# EAGLE board promini7via (EAGLE 9.6.2)
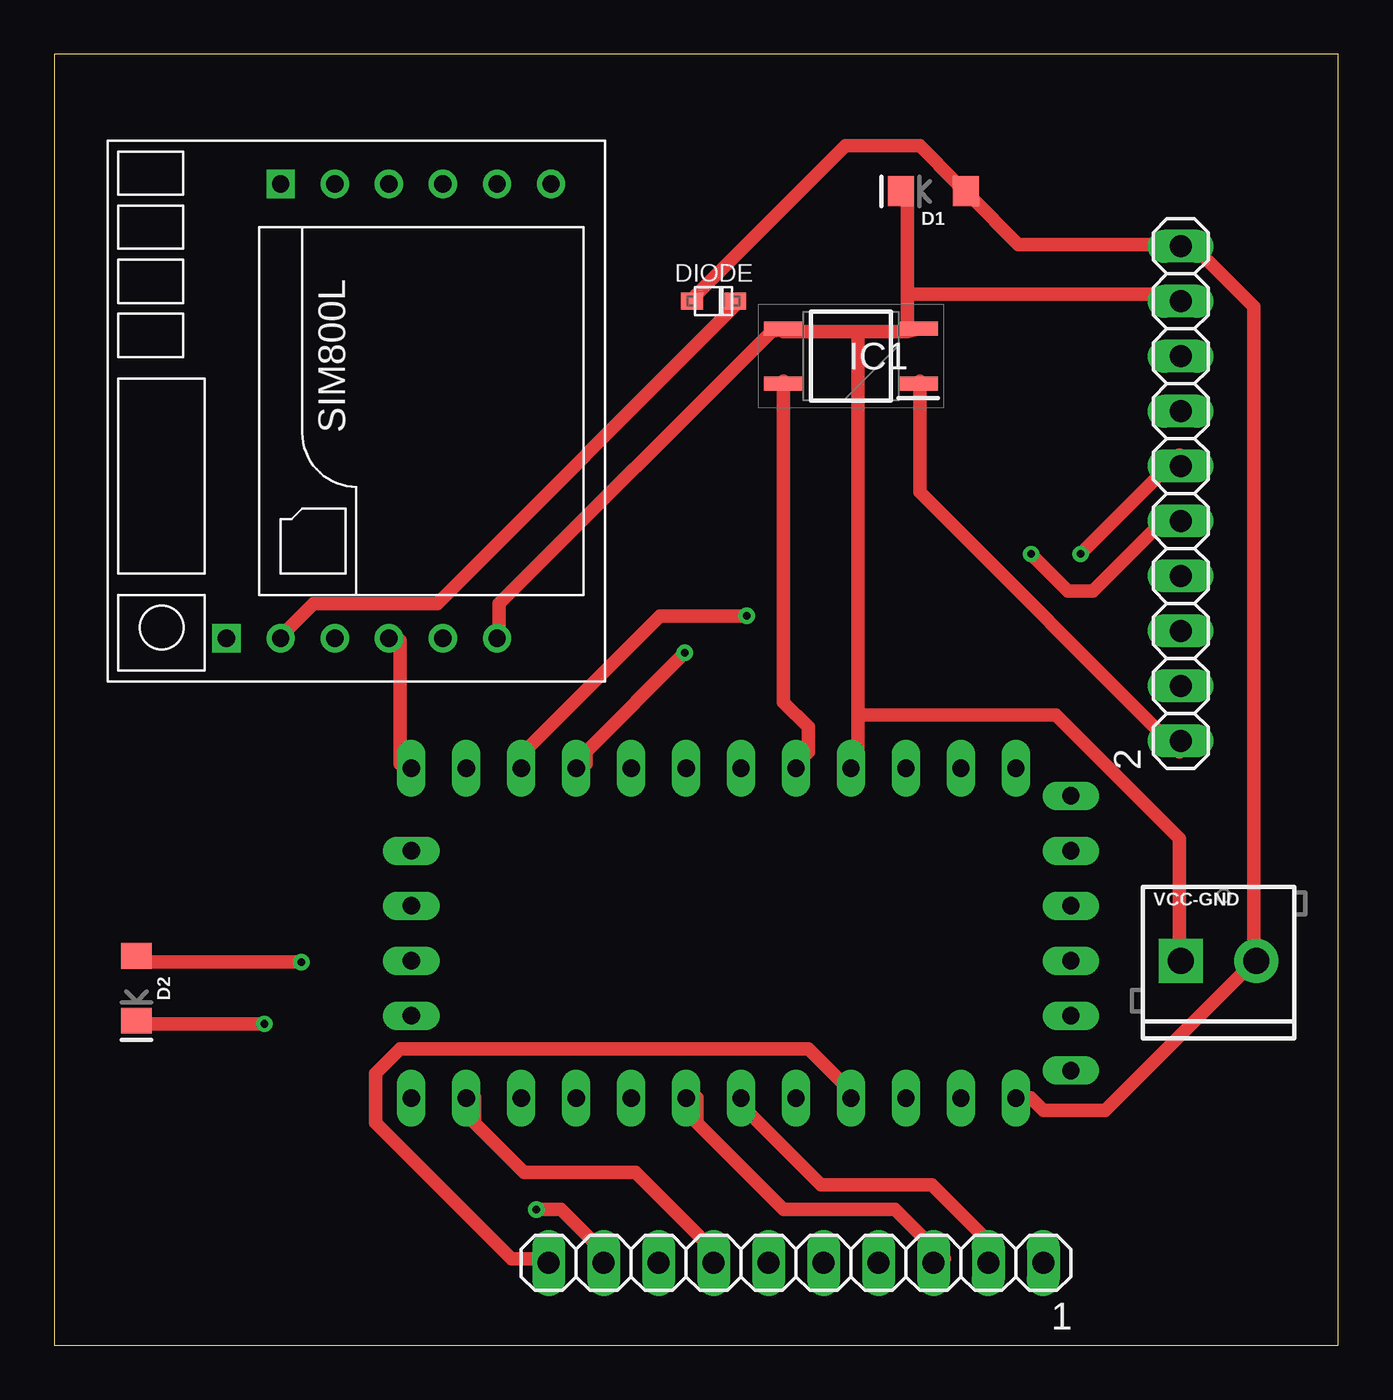
[diagram p0: board, top side]
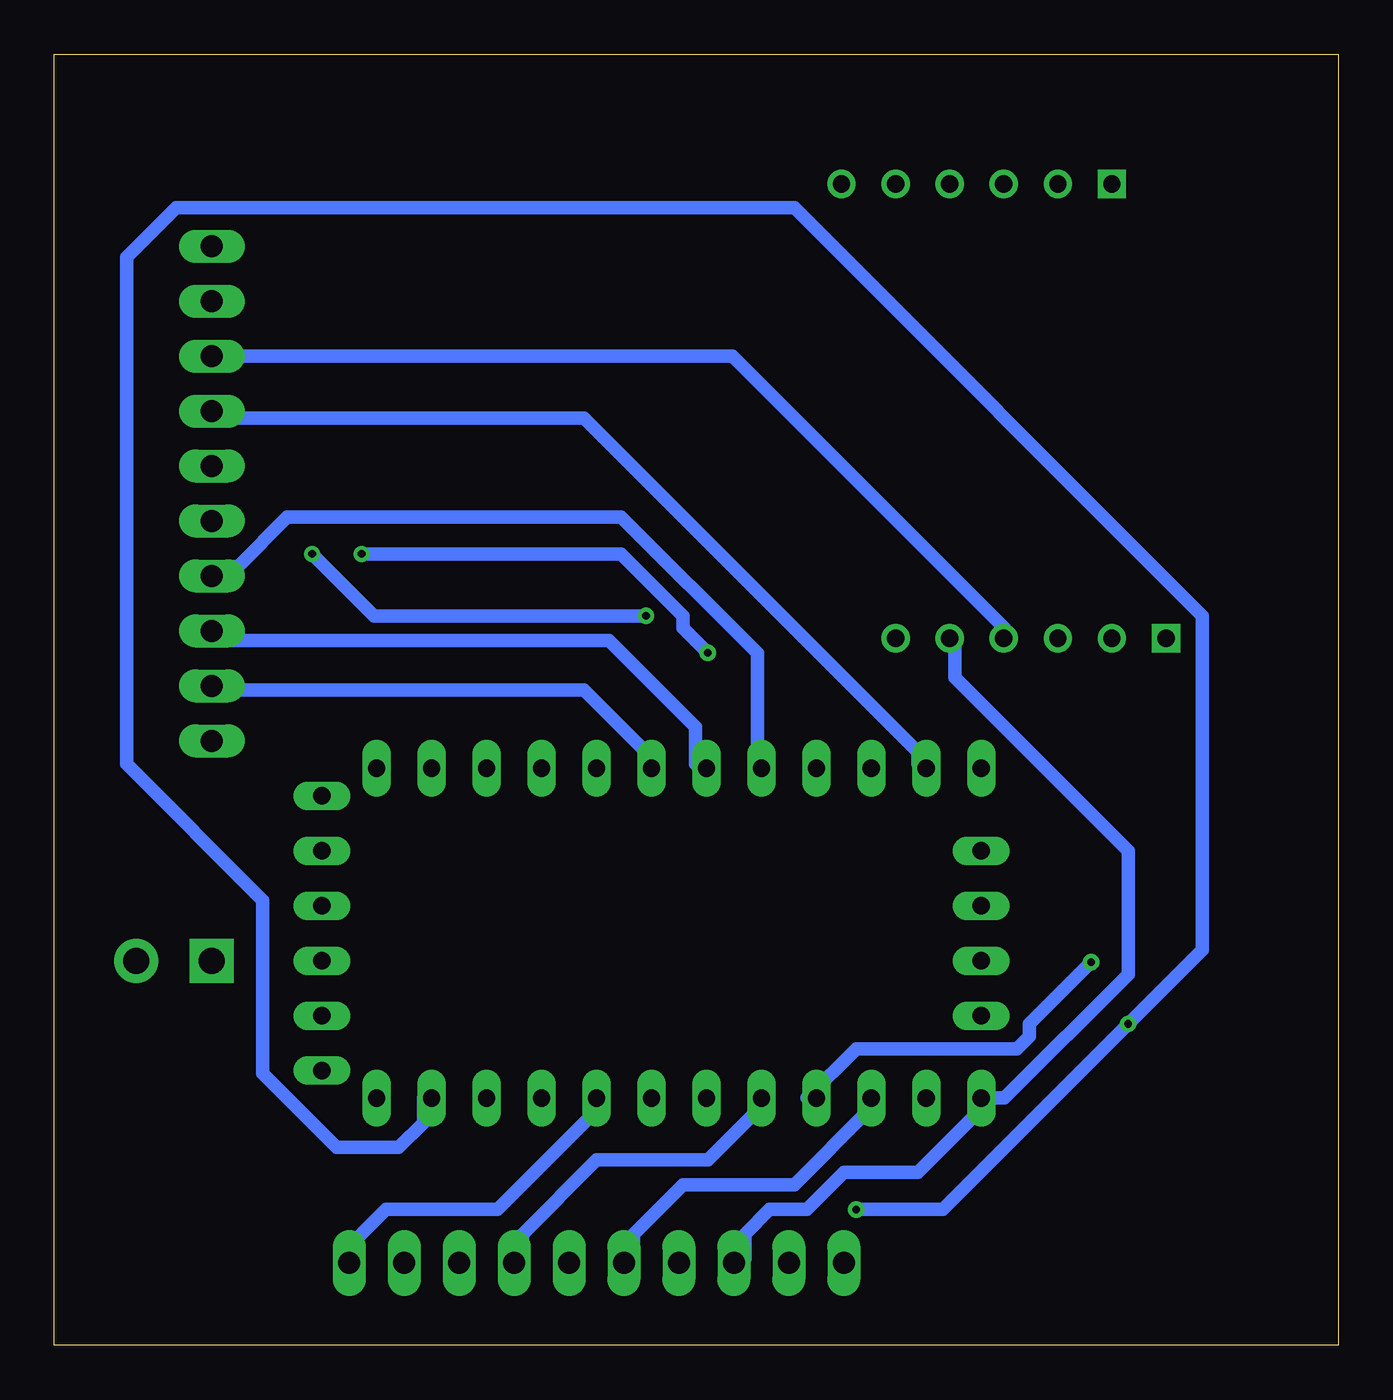
[diagram p1: board, bottom side, seen from below]

Size 59.36 x 59.68 mm. Coordinates in mm from the lower left corner, seen from the top.
Outline: 0,0 59.36,0 59.36,59.68 0,59.68 0,0
Copper layers (1*16): Top 0.035mm / dielectric 1.5mm / Bottom 0.035mm
Design rules "default *": minimum track width 25mil, minimum drill 0.35mm, track to track 20mil, track to pad 20mil, pad to pad 6mil, via to via 6mil, smd to smd 6mil, copper to edge 40mil, drill to drill 6mil, minimum pad ring 10mil, minimum via ring 8mil, stop-mask expansion 4mil, vias tented up to drill 0mil, thermal gap 10mil

## Footprints (pad centres in the part's own frame; a part is rotated, then mirrored left to right if it is on the bottom)
1X10 = drill 1.016 long: 1 -11.43,0; 2 -8.89,0; 3 -6.35,0; 4 -3.81,0; 5 -1.27,0; 6 1.27,0; 7 3.81,0; 8 6.35,0; 9 8.89,0; 10 11.43,0
LED-1206 = smd 1.2 x 1.4: A -1.5,0; C 1.5,0
SOD-323F = smd 1 x 0.8: A -1,0; C 1,0
SOP254P700X200-4N = smd 1.825 x 0.65: 1 -3.112,1.27; 2 -3.112,-1.27; 3 3.112,-1.27; 4 3.112,1.27
PRO-MINI = drill 0.8 long: A0 8.89,8.89; A1 8.89,11.43; A2 8.89,13.97; A3 8.89,16.51; A4 -2.54,-1.27; A5 0,-1.27; A6 2.54,-1.27; A7 5.08,-1.27; D2 -6.35,16.51; D3 -6.35,13.97; D4 -6.35,11.43; D5 -6.35,8.89; D6 -6.35,6.35; D7 -6.35,3.81; D8 -6.35,1.27; D9 -6.35,-1.27; D10 8.89,-1.27; D11 8.89,1.27; D12 8.89,3.81; D13 8.89,6.35; DTR 7.62,29.21; GND 8.89,24.13; GND1 -6.35,19.05; GND2 -5.08,29.21; GND3 -2.54,29.21; RAW 8.89,26.67; RST 8.89,21.59; RST1 -6.35,21.59; RX1 -6.35,24.13; RX1-1 2.54,29.21; TX0 -6.35,26.67; TX0-1 5.08,29.21; VCC 8.89,19.05; VCC1 0,29.21
SIM800LMODULE = drill 0.8: DTR 10.5,1; GND -10.5,-6.5; MIC+ 10.5,-1.5; MIC- 10.5,-4; RST -10.5,1; RX -10.5,-1.5; SPK+ 10.5,-6.5; SPK- 10.5,-9; TX -10.5,-4; VCC -10.5,3.5 | drill 0.8 square: NET -10.5,6; RING 10.5,3.5
SCREWTERMINAL-3.5MM-2 = drill 1.2 pad 2.032 square: 1 0,0 | drill 1.2 pad 2.032: 2 3.5,0

## Placement (x,y rotation side)
1  [1X10]  34.29,3.81 180 top
2  [1X10]  52.07,39.37 90 top
D1  RED  [LED-1206]  40.64,53.34 180 top
D2  RED  [LED-1206]  3.81,16.51 270 top
DIODE  [SOD-323F]  30.48,48.26 0 top
IC1  EL357N-B-TA-G  [SOP254P700X200-4N]  36.83,45.72 180 top
PROMINI  PRO-MINI  [PRO-MINI]  17.78,20.32 270 top
U$1  SIM800LMODULE  [SIM800LMODULE]  13.97,43.18 90 top
VCC-GND  [SCREWTERMINAL-3.5MM-2]  52.07,17.78 0 top

## Library data of the parts
1 2 = pinhead
D1 D2 = SparkFun-LED; PROD_ID: DIO-09912
DIODE = adafruit
IC1 = EL357N-B-TA-G; DESCRIPTION: Optoisolator Transistor Output 3750Vrms 1 Channel 4-SOP (2.54mm); HEIGHT: 2mm; MANUFACTURER_NAME: Everlight Elec; MANUFACTURER_PART_NUMBER: EL357N-B-TA-G
PROMINI = Arduino-clone
U$1 = SIM800LMODULE
VCC-GND = SparkFun-Retired; PROD_ID: CONN-08399

## Nets
D2,D3,D4,D5-IO0,D6-IO2,D7-IO4,D8-IO5,D9-IO9,GND,VIN: 2.6 PROMINI.D7
N$1: 2.10 D1.A DIODE.A PROMINI.RAW VCC-GND.2
N$3: DIODE.C U$1.VCC
N$4: 1.10 PROMINI.VCC
N$5: IC1.4 PROMINI.D2
N$6: 2.8 PROMINI.D9 U$1.RX
N$8: 2.1 IC1.1
N$9: 2.2 PROMINI.D3
N$10: 2.3 PROMINI.D4
N$11: 2.4 PROMINI.D5
N$12: 2.5 PROMINI.D6
N$14: 2.7 PROMINI.D8
N$16: 1.1 PROMINI.A3
N$17: 1.2 PROMINI.A2
N$18: 1.3 PROMINI.A1
N$19: 1.4 PROMINI.A0
N$20: D2.A PROMINI.D13
N$21: 1.6 PROMINI.D12
N$22: 1.7 PROMINI.D11
N$23: 1.8 PROMINI.D10 U$1.TX
N$24: 1.9 D2.C PROMINI.GND
N$26: 2.9 D1.C IC1.2 IC1.3 PROMINI.GND1 U$1.GND VCC-GND.1

## Tracks (layer width: path | path; a pad name or v marks a point on that pad's centre or on a via)
D2,D3,D4,D5-IO0,D6-IO2,D7-IO4,D8-IO5,D9-IO9,GND,VIN  (via drill 0.35)
  Top 0.635: v32,33.72 28,33.72 21.72,27.43 21.72,26.86 PROMINI.D7 | v47.43,36.58 52.01,41.15 2.6
  Bottom 0.635: v32,33.72 44.58,33.72 v47.43,36.58
N$1
  Top 0.635: PROMINI.RAW 45.15,11.43 45.72,10.86 48.58,10.86 55.44,17.72 VCC-GND.2 55.44,18.29 55.44,48.01 52.58,50.86 2.10 52.01,50.86 44.58,50.86 42.29,53.15 D1.A 41.72,53.72 40.01,55.44 36.58,55.44 29.72,48.58 DIODE.A
N$3
  Top 0.635: DIODE.C 31.43,48.01 17.72,34.29 12,34.29 10.86,33.15 U$1.VCC
N$4
  Top 0.635: PROMINI.VCC 36.58,11.43 36.58,12 34.86,13.72 16,13.72 14.86,12.57 14.86,10.29 21.14,4 22.86,4 1.10
N$5
  Top 0.635: IC1.4 33.72,44.58 33.72,29.72 34.86,28.57 34.86,27.43 34.29,26.86 PROMINI.D2
N$6
  Top 0.635: U$1.RX 16,32.58 16,26.86 PROMINI.D9
  Bottom 0.635: 2.8 28,45.72 15.43,33.15 U$1.RX
N$8
  Top 0.635: IC1.1 40.01,44.58 40.01,39.43 52.01,27.43 2.1
N$9
  Bottom 0.635: PROMINI.D3 32,26.86 32,27.43 34.86,30.29 52.01,30.29 2.2
N$10
  Bottom 0.635: PROMINI.D4 29.72,26.86 29.72,28.57 33.72,32.58 52.01,32.58 2.3
N$11
  Bottom 0.635: PROMINI.D5 26.86,26.86 26.86,32 33.15,38.29 48.58,38.29 50.86,36.01 52.01,36.01 2.4
N$12  (via drill 0.35)
  Top 0.635: v29.15,32 24.57,27.43 24.57,26.86 PROMINI.D6 | v45.15,36.58 46.86,34.86 48.01,34.86 50.86,37.72 52.01,37.72 2.5
  Bottom 0.635: v29.15,32 30.29,33.15 30.29,33.72 33.15,36.58 v45.15,36.58
N$14
  Bottom 0.635: PROMINI.D8 19.43,26.86 19.43,27.43 34.86,42.86 52.01,42.86 2.7
N$16
  Bottom 0.635: PROMINI.A3 34.29,10.86 38.86,6.29 44.01,6.29 45.72,4.57 1.1
N$17
  Top 0.635: PROMINI.A2 32,11.43 32,10.86 35.43,7.43 40.58,7.43 42.86,5.14 42.86,4 1.2
N$18
  Top 0.635: PROMINI.A1 29.72,11.43 29.72,10.29 33.72,6.29 38.86,6.29 41.15,4 1.3
N$19
  Bottom 0.635: PROMINI.A0 26.86,11.43 26.86,10.86 29.15,8.57 34.29,8.57 37.72,5.14 37.72,4 1.4
N$20  (via drill 0.35)
  Top 0.635: v11.43,17.72 4,17.72 D2.A
  Bottom 0.635: v11.43,17.72 14.29,14.86 14.29,14.29 14.86,13.72 22.29,13.72 24.57,11.43 PROMINI.D13
N$21
  Bottom 0.635: PROMINI.D12 21.72,11.43 21.72,10.86 25.15,7.43 30.29,7.43 32.58,5.14 32.58,4 1.6
N$22
  Top 0.635: PROMINI.D11 19.43,11.43 19.43,10.29 21.72,8 26.86,8 30.86,4 1.7
N$23
  Bottom 0.635: 1.8 27.43,4 27.43,5.14 26.29,6.29 24.57,6.29 22.86,8 19.43,8 16.57,10.86 16.57,11.43 PROMINI.D10 15.43,11.43 9.72,17.14 9.72,22.86 17.72,30.86 17.72,32.58 U$1.TX
N$24  (via drill 0.35)
  Top 0.635: v9.72,14.86 4,14.86 D2.C | v22.29,6.29 23.43,6.29 25.72,4 1.9
  Bottom 0.635: v22.29,6.29 18.29,6.29 v9.72,14.86 6.29,18.29 6.29,33.72 25.15,52.58 53.72,52.58 56.01,50.29 56.01,26.86 49.72,20.57 49.72,12.57 46.29,9.14 43.43,9.14 42.29,10.29 42.29,11.43 PROMINI.GND
N$26
  Top 0.635: 39.43,46.86 39.43,48.58 | 39.43,48.58 39.43,53.15 D1.C | 39.43,46.86 37.15,46.86 | 37.15,46.86 33.72,46.86 IC1.3 33.15,46.86 20.57,34.29 20.57,33.15 U$1.GND | 39.43,46.86 IC1.2 | 37.15,46.86 37.15,29.15 | 37.15,29.15 37.15,26.86 PROMINI.GND1 | 39.43,48.58 52.01,48.58 2.9 | 37.15,29.15 46.29,29.15 52.01,23.43 52.01,18.29 VCC-GND.1